# Altium PCB RFID-PCB.PcbDoc
Units mm, origin at the board's own origin, x right, y up, seen from the top; angles counter-clockwise.
Board outline 77 x 135 mm, 2 copper layers (Top Layer, Bottom Layer); 85 components, 57 nets, 286 pads, 72 vias.
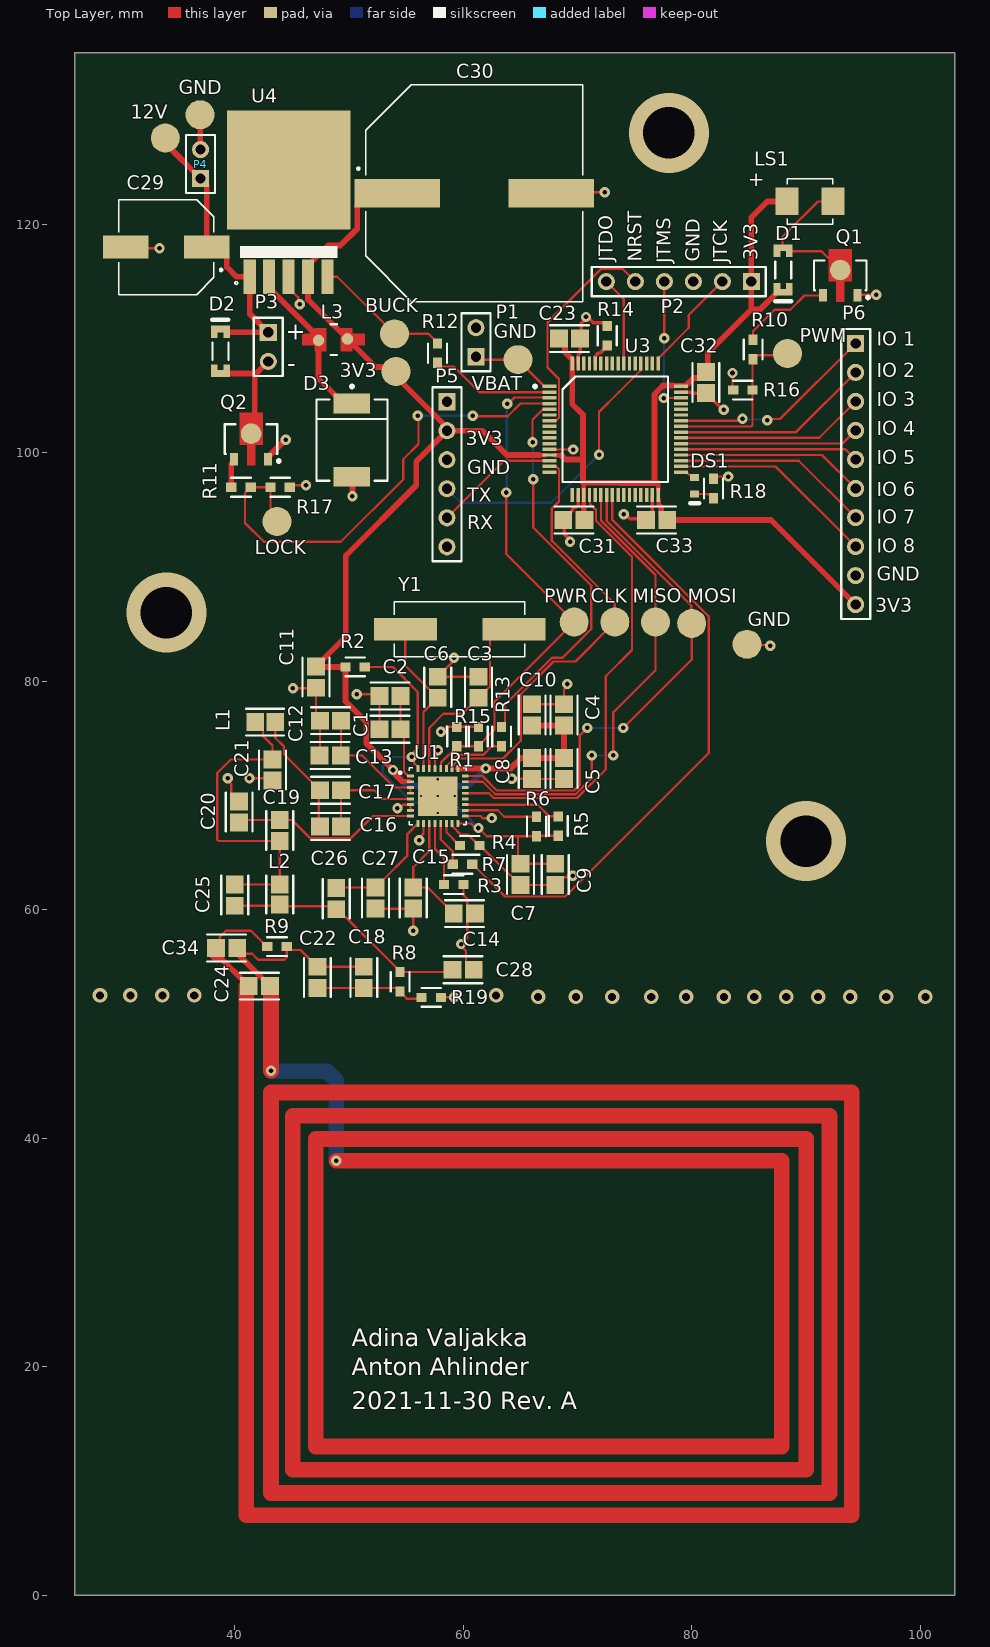
[diagram p0: Top Layer view]
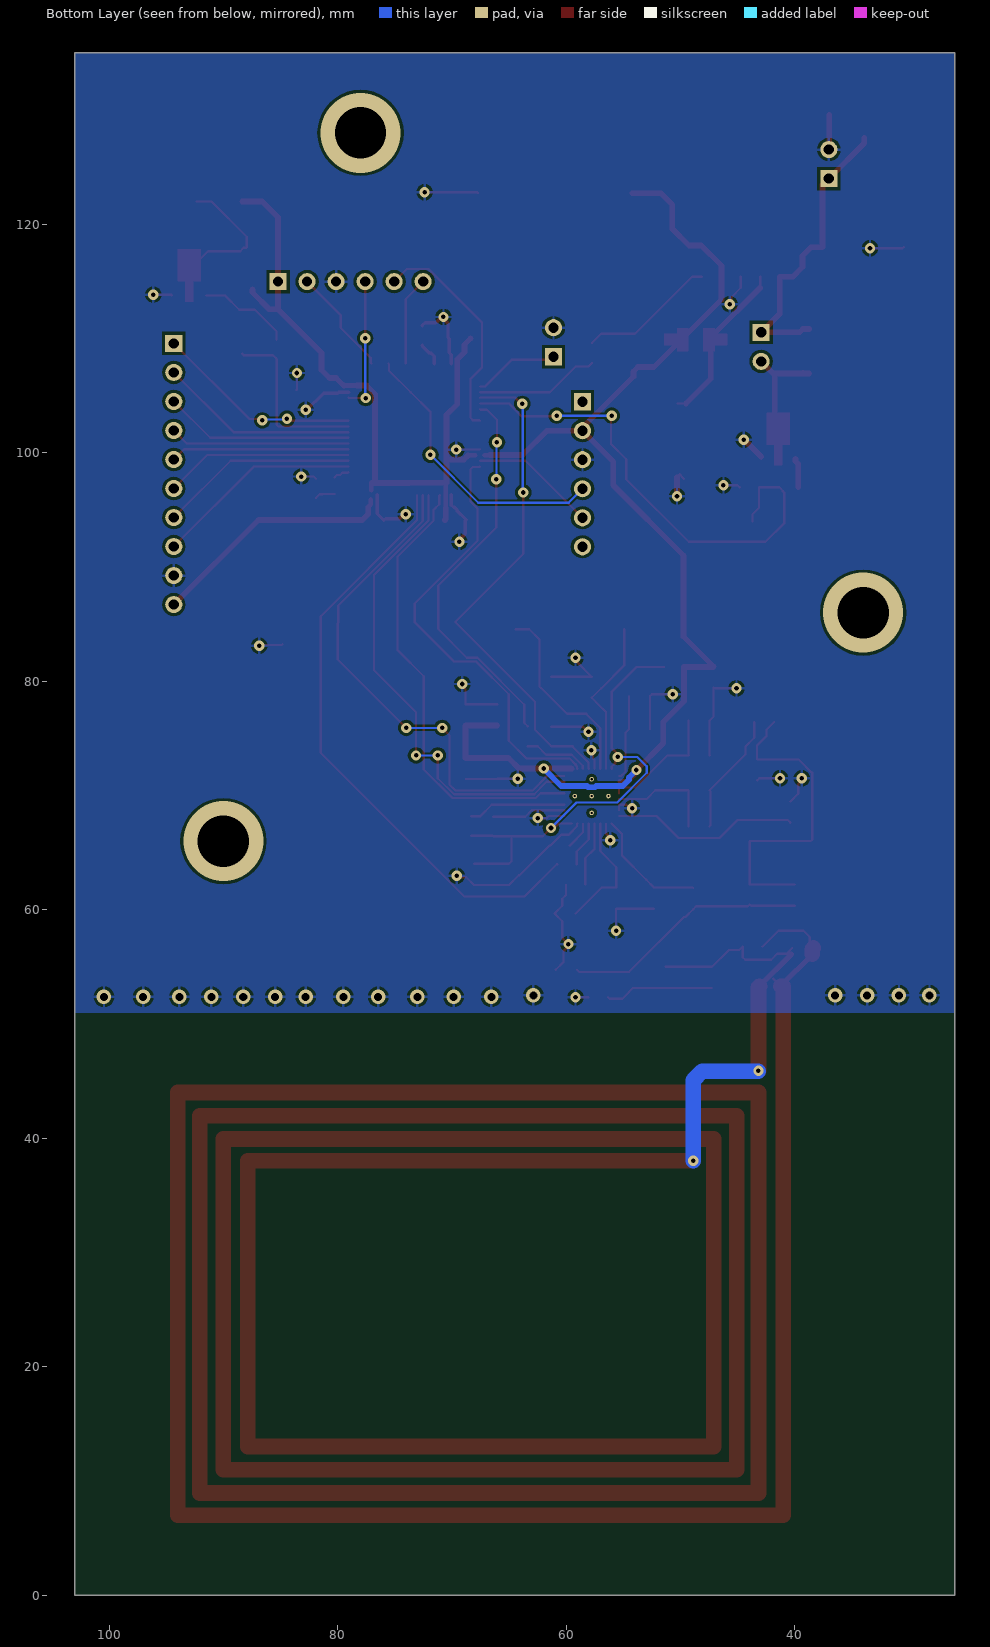
[diagram p1: Bottom Layer view, seen from below]
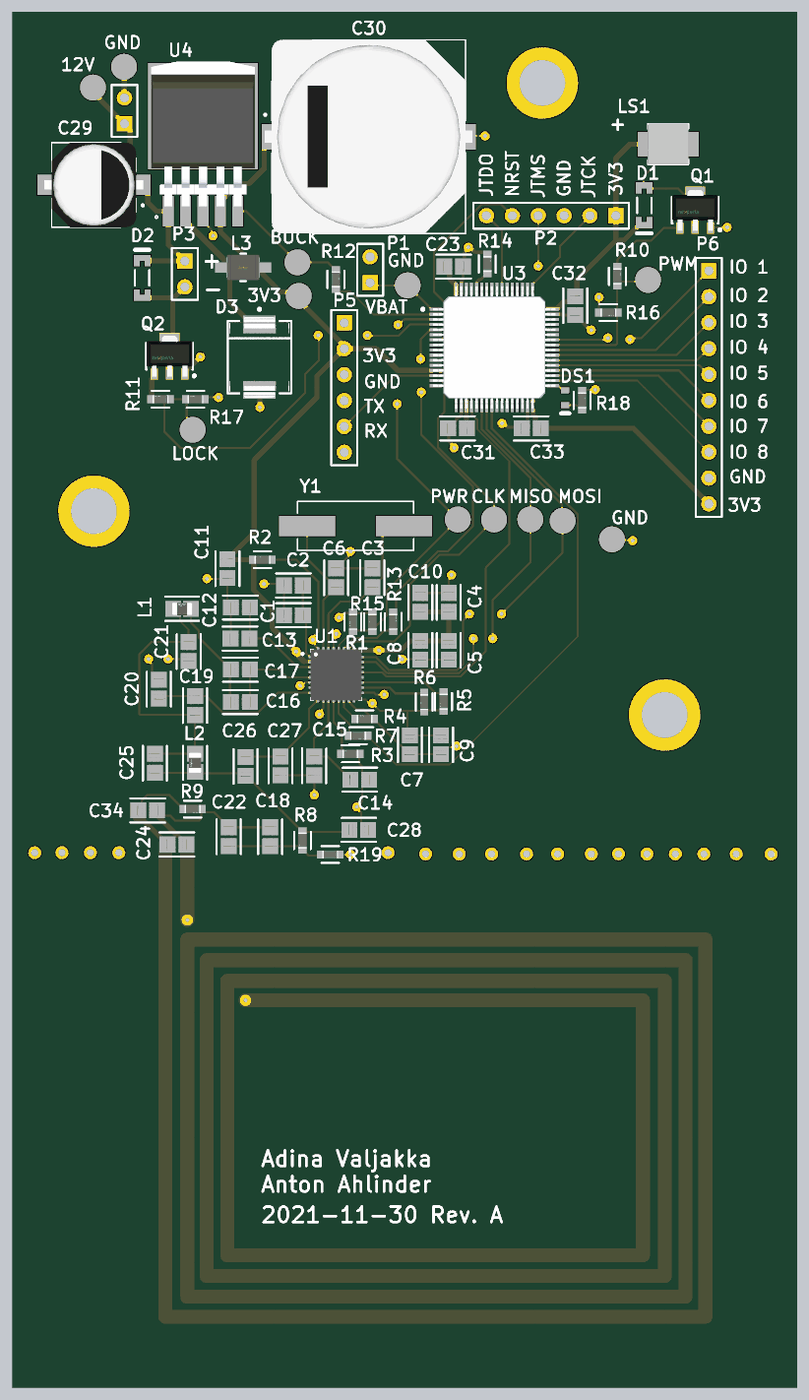
[diagram p2: 3D render of the assembled board from above, using the file's embedded part models]

## Layer stack, top to bottom
Top Solder: solder mask 0.0102, Solder Resist, Dk 3.5
Top Layer: signal copper 0.0356
Dielectric 1: dielectric 0.32, FR-4, Dk 4.8
Bottom Layer: signal copper 0.0356
Bottom Solder: solder mask 0.0102, Solder Resist, Dk 3.5

## Board outline
26,0 103,0 103,135 26,135

## Design rules (kind name [scope] priority, off if disabled: settings)
Clearance [All] p1: gap=0.254 ignorepadtopadclearanceinfootprint=FALSE except(0: Arc-Hole Track-Hole SMDPad-Hole THPad-Hole Via-Hole Fill-Hole Poly-Hole Region-Hole Text-Hole; 0.125: Arc-Arc Arc-Track Arc-SMDPad Arc-Via Track-Track Track-SMDPad Track-Via SMDPad-SMDPad Via-Via; 0.15: Arc-Fill Arc-Poly Arc-Region Track-Fill Track-Poly Track-Region)
HoleSize [All] p1: absolutevalues=TRUE maxlimit=7 minlimit=0.025 maxpercent=80.000 minpercent=20.000
MinimumSolderMaskSliver [All] p1: minsoldermaskwidth=0.1
PolygonConnect [All] p1: connectstyle=Relief reliefconductorwidth=0.254 reliefentries=4 polygonreliefangle="90 Angle" airgapwidth=0.254
RoutingVias [All] p1: holewidth=0.4 width=0.9 viastyle="Through Hole" minholewidth=0.4 minwidth=0.4 maxholewidth=0.711 maxwidth=1.27
SilkToSilkClearance [All] p1: silktosilkclearance=0.05
SilkToSolderMaskClearance [IsPad] p1: minsilkscreentomaskgap=0.05 clearancetoexposedcopper=TRUE
SolderMaskExpansion [All] p1: expansion=0.102 istentingtop=FALSE
Width [All] p1: maxlimit=1.37 minlimit=0.125 preferedwidth=0.2 minimp=50.000000 maximp=50.000000 favimp=50.000000
26 further rules are at their usual default settings.

## Classes and differential pairs
component class RFID: C1 C2 C3 C4 C5 C6 C7 C8 C9 C10 C11 C12 C13 C14 C15 C16 C17 C18 C19 C20 C21 C22 C24 C25 C26 C27 C28 C34 L1 L2 R1 R2 R3 R4 R5 R6 R7 R8 R9 R13 R15 R19 U1 Y1
component class Power: 3V3 12V BUCK C29 C30 D3 GND L3 P4 R12 U4
component class MCU: C23 C31 C32 C33 CLK D1 D2 DS1 GND LOCK LS1 MISO MOSI P1 P2 P3 P5 P6 PWM PWR Q1 Q2 R10 R11 R14 R16 R17 R18 U3 VBAT

## Components (designator, comment, footprint, x,y, rotation, side; value= is the part's Value field where it differs from the comment)
3V3 "testpoint" Testpoint 54.102,107.108 r0 top (schematic designator TP8)
12V "testpoint" Testpoint 33.909,127.555 r0 top (schematic designator TP7)
BUCK "testpoint" Testpoint 53.975,110.41 r0 top (schematic designator TP9)
C1 "10nF" FP-GCJ21B-0_3-IPC_A 53.578,75.786 r0 top
C2 "2.2uF" FP-GCJ21B-0_3-IPC_A 53.578,78.707 r0 top
C3 "27pF" FP-GCJ21B-0_3-IPC_A 61.325,79.469 r270 top
C4 "10nF" FP-GCJ21B-0_3-IPC_A 68.818,77.056 r270 top
C5 "10nF" FP-GCJ21B-0_3-IPC_A 68.818,72.357 r90 top
C6 "27pF" FP-GCJ21B-0_3-IPC_A 57.769,79.469 r90 top
C7 "10nF" FP-GCJ21B-0_3-IPC_A 65.008,63.086 r270 top
C8 "10nF" FP-GCJ21B-0_3-IPC_A 66.024,72.357 r90 top
C9 "2.2uF" FP-GCJ21B-0_3-IPC_A 68.056,63.086 r270 top
C10 "2.2uF" FP-GCJ21B-0_3-IPC_A 66.024,77.056 r270 top
C11 "0.1uF" FP-GCJ21B-0_3-IPC_A 47.101,80.358 r270 top
C12 "10nF" FP-GCJ21B-0_3-IPC_A 48.371,76.548 r0 top
C13 "2.2uF" FP-GCJ21B-0_3-IPC_A 48.335,73.5 r0 top
C14 "10nF" FP-GCJ21B-0_3-IPC_A 60.091,59.657 r180 top
C15 "2.2uF" FP-GCJ21B-0_3-IPC_A 55.61,61.018 r90 top
C16 "1500pF" FP-GCJ21B-0_3-IPC_A 48.371,67.277 r0 top
C17 "1500pF" FP-GCJ21B-0_3-IPC_A 48.371,70.452 r0 top
C18 "47pF" FP-GCJ21B-0_3-IPC_A 51.292,54.069 r90 top
C19 "1200pF" FP-GCJ21B-0_3-IPC_A 43.926,66.932 r90 top
C20 "1200pF" FP-GCJ21B-0_3-IPC_A 40.37,68.547 r90 top
C21 "680pF" FP-GCJ21B-0_3-IPC_A 43.291,72.23 r270 top
C22 "10pF" FP-GCJ21B-0_3-IPC_A 47.228,54.069 r270 top
C23 "100nF" FP-GCJ21B-0_3-IPC_A 69.297,109.992 r180 top
C24 "56pF" FP-GCJ21B-0_3-IPC_A 42.148,53.307 r180 top
C25 "10pF" FP-GCJ21B-0_3-IPC_A 39.989,61.272 r90 top
C26 "220pF" FP-GCJ21B-0_3-IPC_A 48.879,60.963 r90 top
C27 "680pF" FP-GCJ21B-0_3-IPC_A 52.308,61.018 r270 top
C28 "100pF" FP-GCJ21B-0_3-IPC_A 59.98,54.737 r0 top
C29 "EEETC1C101P" CAP_EEETC1C101P 34,118 r180 top
C30 "EEETK1H102AM" CAP_EEETK1H102AM 60.96,122.729 r0 top
C31 "100nF" FP-GCJ21B-0_3-IPC_A 69.678,94.117 r180 top
C32 "100nF" FP-GCJ21B-0_3-IPC_A 81.235,106.146 r90 top
C33 "100nF" FP-GCJ21B-0_3-IPC_A 76.917,94.117 r180 top
C34 "DNP" FP-GCJ21B-0_3-IPC_A 39.279,56.642 r0 top
CLK "testpoint" Testpoint 73.263,85.184 r0 top (schematic designator TP3)
D1 "LL4148" FAIR-SOD80-2_V 88,116 r270 top
D2 "LL4148" FAIR-SOD80-2_V 38.735,108.886 r90 top
D3 "SS34-E3/57T" FP-95402-MFG 50.247,101.102 r270 top
DS1 "TLMS1000-GS08" VISH-TLMS1000_V 80.248,97.122 r270 top
GND "testpoint" Testpoint 36.957,129.587 r90 top (schematic designator TP12)
GND "testpoint" Testpoint 84.836,83.232 r90 top (schematic designator TP11)
L1 "LQM21NNR33K10D" FP-LQM21DN_00-IPC_A 42.656,76.421 r180 top
L2 "LQM21NNR33K10D" FP-LQM21DN_00-IPC_A 43.926,61.321 r270 top
L3 "LQH32CN101K23L" FP-LQH32CH_23-MFG 48.641,109.902 r0 top
LOCK "testpoint" Testpoint 43.688,93.98 r0 top (schematic designator TP2)
LS1 "CMT-4023S-SMT-TR" CUI_CMT-4023S-SMT-TR 90.35,122 r180 top
MISO "testpoint" Testpoint 76.819,85.184 r0 top (schematic designator TP5)
MOSI "testpoint" Testpoint 79.994,85.057 r0 top (schematic designator TP4)
P1 "Header 2" HDR1X2 61.106,108.405 r90 top
P2 "Header 6" HDR1X6 85.217,114.982 r180 top
P3 "Header 2" HDR1X2 42.926,110.537 r270 top
P4 "Header 2" HDR1X2 37,124 r90 top
P5 "Header 6" HDR1X6 58.566,104.468 r270 top
P6 "Header 10" HDR1X10 94.345,109.568 r270 top
PWM "testpoint" Testpoint 88.376,108.679 r0 top (schematic designator TP6)
PWR "testpoint" Testpoint 69.707,85.184 r0 top (schematic designator TP1)
Q1 "PBHV8115X,115" FP-SOT89-MFG 93,115.522 r0 top
Q2 "PBHV8115X,115" FP-SOT89-MFG 41.421,101.196 r0 top
R1 "10k" FP-AC0603-MFG 59.42,75.151 r270 top value=60.4Ω
R2 "100" FP-AC0603-MFG 50.53,81.247 r180 top value=60.4Ω
R3 "1k" FP-AC0603-MFG 59.166,62.197 r180 top value=60.4Ω
R4 "1k" FP-AC0603-MFG 60.563,65.626 r180 top value=60.4Ω
R5 "10k" FP-AC0603-MFG 68.31,67.316 r270 top value=60.4Ω
R6 "10k" FP-AC0603-MFG 66.405,67.277 r270 top value=60.4Ω
R7 "1k" FP-AC0603-MFG 59.928,63.975 r0 top value=60.4Ω
R8 "0" FP-AC0603-MFG 54.467,53.688 r270 top value=60.4Ω
R9 "1k" FP-AC0603-MFG 43.688,56.769 r0 top value=60.4Ω
R10 "220" FP-AC0603-MFG 85.363,109.04 r90 top value=60.4Ω
R11 "220" FP-AC0603-MFG 40.532,96.975 r180 top value=60.4Ω
R12 "0" FP-AC0603-MFG 57.74,108.722 r90 top value=60.4Ω
R13 "0" FP-AC0603-MFG 63.357,75.151 r90 top value=60.4Ω
R14 "0" FP-AC0603-MFG 72.599,110.246 r90 top value=60.4Ω
R15 "100k" FP-AC0603-MFG 61.325,75.151 r270 top value=60.4Ω
R16 "100k" FP-AC0603-MFG 84.474,105.484 r0 top value=60.4Ω
R17 "100k" FP-AC0603-MFG 43.961,96.975 r180 top value=60.4Ω
R18 "1K" FP-AC0603-MFG 81.899,96.868 r90 top value=60.4Ω
R19 "DNP" FP-AC0603-MFG 57.189,52.324 r180 top value=60.4Ω
U1 "TRF7960RHBT" IC_ADS125H01IRHBT 57.769,69.944 r0 top
U3 "STM32L451RCT6" LQFP-64 73.298,102.055 r0 top
U4 "LM2576D2TR4-3.3G" D2PAK-5 44.704,119.935 r90 top
VBAT "testpoint" Testpoint 64.789,108.151 r90 top (schematic designator TP10)
Y1 "ECS-135.600-CDX-0374" XTAL_ECS-135.600-CDX-0374 59.674,84.549 r0 top

## Footprints (in the part's own frame and the unit in brackets; to place one, negate y for a bottom-side part, rotate by r counter-clockwise, add the part's x,y. Pads: shape width x height; smd on the part's side, far side on the other; paste and mask are expansions set on the pad)
CAP_EEETC1C101P [mm]
  rect 4x2 smd: 1(-3.55,0) 2(3.55,0)
  silkscreen extent -4.9,-4.15 4.15,4.15, body extent -4.85,-4.15 4.85,4.15, height 10.2
CAP_EEETK1H102AM [mm]
  rect 7.5x2.5 smd: 1(-6.75,0) 2(6.75,0)
  silkscreen extent -10.25,-9.5 9.5,9.5, body extent -10.2,-9.5 10.2,9.5, height 16.51
CUI_CMT-4023S-SMT-TR [mm]
  rect 2x2.4 smd: N(-2,0) P(2,0)
  silkscreen extent -2,-2 2,2, body extent -2,-2 2,2, height 2
D2PAK-5 [mil]
  rect 118.11x42 smd: 1(-178,134) 2(-178,67) 3(-178,0) 4(-178,-67) 5(-178,-134)
  rect 409.84x425.2 smd: 6(189.37,0)
  silkscreen extent -205,-167 -74,185, body extent -159,-200 400,200, height 180
FAIR-SOD80-2_V [mm] "SOD, 2-Leads, Body 3.45x1.4mm"
  rect 0.6x1.65 smd: 1(-1.95,0) 2(1.95,0)
  rect 1.1x0.575 smd: 1(-1.7,-0.537) 1(-1.7,0.537) 2(1.7,-0.537) 2(1.7,0.537)
  silkscreen extent -0.75,-0.7 2.75,0.7, body extent -1.73,-0.7 1.73,0.7, height 2.1
FP-95402-MFG [mm]
  rect 1.72x3.2 smd paste+0 mask+0: 1(-3.205,0) 2(3.205,0)
  silkscreen extent -4.82,-3.11 3.55,3.11, body extent -4.17,-3.21 4.17,3.21, height 0.25
FP-AC0603-MFG [mm]
  rect 0.9x0.8 smd paste+0 mask+0: 1(-0.85,0) 2(0.85,0)
  silkscreen extent -0.85,-0.82 0.85,0.82, body extent -1.4,-0.55 1.4,0.55, height 0.25
FP-GCJ21B-0_3-IPC_A [mm]
  rect 1.553x1.556 smd paste+0 mask+0: 1(-0.925,0) 2(0.925,0)
  silkscreen extent -1.7,-1.18 1.7,1.18, body extent -2.2,-1.28 2.2,1.28, height 0.25
FP-LQH32CH_23-MFG [mm]
  round 0.995 smd paste+0 mask+0: 1(-1.313,-0.062)
  round 1.012 smd paste+0 mask+0: 2(1.212,0.062)
  Top Layer region: -1.65,-1 -1.65,-0.5 -2.75,-0.5 -2.75,0.5 -1.65,0.5 -1.65,1 -0.65,1 -0.65,-1
  Top Layer region: 0.65,-1 0.65,1 1.65,1 1.65,0.5 2.75,0.5 2.75,-0.5 1.65,-0.5 1.65,-1
  silkscreen extent -0.27,-1.35 0.27,1.35, body extent -2.85,-1.45 2.85,1.45, height 0.25
FP-LQM21DN_00-IPC_A [mm]
  rect 1.554x1.556 smd paste+0 mask+0: 1(-0.876,0) 2(0.876,0)
  silkscreen extent -1.65,-1.18 1.65,1.18, body extent -2.15,-1.28 2.15,1.28, height 0.25
FP-SOT89-MFG [mm]
  rect 0.7x1.1 smd paste-1000 mask+0: 1(1.5,-1.75) 3(-1.5,-1.75)
  round 1.8 smd paste-1000 mask+0: 2(0,0.478)
  Top Layer region: -1,2.3 1,2.3 1,-0.5 0.35,-0.5 0.35,-2.3 -0.35,-2.3 -0.35,-0.5 -1,-0.5
  silkscreen extent -2.3,-2.05 2.55,1.3, body extent -2.4,-2.42 2.4,2.42, height 0.25
HDR1X2 [mm] "Connector; Header; 2 Position"
  rect 1.5x1.5 hole 0.9: 1(0,0)
  round 1.5 hole 0.9: 2(2.54,0)
  silkscreen extent -1.27,-1.27 3.81,1.27
HDR1X6 [mm] "Connector; Header; 6 Position"
  rect 1.5x1.5 hole 0.9: 1(0,0)
  round 1.5 hole 0.9: 2(2.54,0) 3(5.08,0) 4(7.62,0) 5(10.16,0) 6(12.7,0)
  silkscreen extent -1.27,-1.27 13.97,1.27
HDR1X10 [mm] "Connector; Header; 10 Position"
  rect 1.5x1.5 hole 0.9: 1(0,0)
  round 1.5 hole 0.9: 2(2.54,0) 3(5.08,0) 4(7.62,0) 5(10.16,0) 6(12.7,0) 7(15.24,0) 8(17.78,0) 9(20.32,0) 10(22.86,0)
  silkscreen extent -1.27,-1.27 24.13,1.27
IC_ADS125H01IRHBT [mm]
  rrect25% 0.6x0.25 smd mask+0: 1(-2.4,1.75) 2(-2.4,1.25) 3(-2.4,0.75) 4(-2.4,0.25) 5(-2.4,-0.25) 6(-2.4,-0.75) 7(-2.4,-1.25) 8(-2.4,-1.75) 17(2.4,-1.75) 18(2.4,-1.25) 19(2.4,-0.75) 20(2.4,-0.25) 21(2.4,0.25) 22(2.4,0.75) 23(2.4,1.25) 24(2.4,1.75)
  rrect25% 0.25x0.6 smd mask+0: 9(-1.75,-2.4) 10(-1.25,-2.4) 11(-0.75,-2.4) 12(-0.25,-2.4) 13(0.25,-2.4) 14(0.75,-2.4) 15(1.25,-2.4) 16(1.75,-2.4) 25(1.75,2.4) 26(1.25,2.4) 27(0.75,2.4) 28(0.25,2.4) 29(-0.25,2.4) 30(-0.75,2.4) 31(-1.25,2.4) 32(-1.75,2.4)
  rect 3.45x3.45 smd paste-3 mask+0: 33(0,0)
  round 0.4 hole 0.2 mask+0: 34(0,0) 35(0,1.475) 36(-1.475,0) 37(0,-1.475) 38(1.475,0)
  silkscreen extent -3.39,-2.5 2.5,2.5, body extent -2.5,-2.5 2.5,2.5, height 1
LQFP-64 [mm]
  rect 1.2x0.3 smd mask+0.05: 1(-5.75,3.75) 2(-5.75,3.25) 3(-5.75,2.75) 4(-5.75,2.25) 5(-5.75,1.75) 6(-5.75,1.25) 7(-5.75,0.75) 8(-5.75,0.25) 9(-5.75,-0.25) 10(-5.75,-0.75) 11(-5.75,-1.25) 12(-5.75,-1.75) 13(-5.75,-2.25) 14(-5.75,-2.75) 15(-5.75,-3.25) 16(-5.75,-3.75) 33(5.75,-3.75) 34(5.75,-3.25) 35(5.75,-2.75) 36(5.75,-2.25) 37(5.75,-1.75) 38(5.75,-1.25) 39(5.75,-0.75) 40(5.75,-0.25) 41(5.75,0.25) 42(5.75,0.75) 43(5.75,1.25) 44(5.75,1.75) 45(5.75,2.25) 46(5.75,2.75) 47(5.75,3.25) 48(5.75,3.75)
  rect 0.3x1.2 smd mask+0.05: 17(-3.75,-5.75) 18(-3.25,-5.75) 19(-2.75,-5.75) 20(-2.25,-5.75) 21(-1.75,-5.75) 22(-1.25,-5.75) 23(-0.75,-5.75) 24(-0.25,-5.75) 25(0.25,-5.75) 26(0.75,-5.75) 27(1.25,-5.75) 28(1.75,-5.75) 29(2.25,-5.75) 30(2.75,-5.75) 31(3.25,-5.75) 32(3.75,-5.75) 49(3.75,5.75) 50(3.25,5.75) 51(2.75,5.75) 52(2.25,5.75) 53(1.75,5.75) 54(1.25,5.75) 55(0.75,5.75) 56(0.25,5.75) 57(-0.25,5.75) 58(-0.75,5.75) 59(-1.25,5.75) 60(-1.75,5.75) 61(-2.25,5.75) 62(-2.75,5.75) 63(-3.25,5.75) 64(-3.75,5.75)
  silkscreen extent -7.15,-4.61 4.61,4.61, body extent -6,-6 6,6, height 1.46
Testpoint [mm]
  round 2.54 smd: 1(0,0)
VISH-TLMS1000_V [mm] "SMD, 2-Leads, Body 0.8x1.6mm"
  rect 0.6x0.8 smd: 1(-0.725,0) 2(0.725,0)
  silkscreen extent 1.53,-0.4 1.53,0.4, body extent -0.8,-0.4 0.8,0.4, height 0.65
XTAL_ECS-135.600-CDX-0374 [mm]
  rect 5.5x2 smd: 1(-4.75,0) 2(4.75,0)
  silkscreen extent -5.7,-2.4 5.7,2.4

## Part data
C1 C3 C4 C5 C6 C7 C8 C11 C12 C14 C16 C17 C18 C19 C20 C21 C22 C23 C24 C25 C26 C27 C28 C31 C32 C33 C34: library part CMP-2007-03210-2, "Multilayer Ceramic Capacitors MLCC - SMD/SMT 0805 2.2uF 10%, 16VDC,  X7R 15%", Capacitance=2.2uF, Case Code (Imperial)=0805, Case Code (Metric)=2012, Dielectric=X7R, Max Operating Temperature=125°C, Min Operating Temperature=-55°C, Package Quantity=1, Ratings=AEC-Q200, Tolerance=10%, Voltage Rating=16V, Case/Package=0805, Depth=1.25mm, Features="Soft Termination", Height=1.25mm, Lead Free="Lead Free", Length=2mm, Mount="Surface Mount", Packaging="Tape and Reel", Radiation Hardening=No, Termination=SMD/SMT, Thickness=0.057inch, Voltage Rating (DC)=16V, Width=0.049inch
C2 C9 C10 C13 C15: library part CMP-2007-03210-2, "Multilayer Ceramic Capacitors MLCC - SMD/SMT 0805 2.2uF 10%, 16VDC,  X7R 15%", Case Code (Imperial)=0805, Case Code (Metric)=2012, Dielectric=X7R, Max Operating Temperature=125°C, Min Operating Temperature=-55°C, Package Quantity=1, Ratings=AEC-Q200, Tolerance=10%, Voltage Rating=16V, Capacitance=2.2uF, Case/Package=0805, Depth=1.25mm, Features="Soft Termination", Height=1.25mm, Lead Free="Lead Free", Length=2mm, Mount="Surface Mount", Packaging="Tape and Reel", Radiation Hardening=No, Termination=SMD/SMT, Thickness=0.057inch, Voltage Rating (DC)=16V, Width=0.049inch
C29: "100µF 16V Aluminum Electrolytic Capacitors Radial, Can - SMD 200mOhm @ 100kHz 3000 Hrs @ 125°C", Package="RADIAL-2 Panasonic", Availability="In Stock", Check_prices=https://www.snapeda.com/parts/EEETC1C101P/Panasonic/view-part/?ref=eda, MF=Panasonic, MP=EEETC1C101P, Price=None, SnapEDA_Link=https://www.snapeda.com/parts/EEETC1C101P/Panasonic/view-part/?ref=snap
C30: "1000µF 50V Aluminum Electrolytic Capacitors Radial, Can - SMD 140mOhm @ 100kHz 2000 Hrs @ 125°C", Package="RADIAL-2 Panasonic", Availability="In Stock", Check_prices=https://www.snapeda.com/parts/EEE-TK1H102AM/Panasonic%20Electronic%20Components/view-part/2193516/?ref=eda, MF="Panasonic Electronic", MP=EEE-TK1H102AM, Price=None, Purchase-URL=https://pricing.snapeda.com/search/part/EEE-TK1H102AM/?ref=eda, SnapEDA_Link=https://www.snapeda.com/parts/EEE-TK1H102AM/Panasonic%20Electronic%20Components/view-part/2193516/?ref=snap
D1 D2: library part CMP-2000-05115-2, "Small Signal Diode, 100 V, 0.2 A, -55 to 175 degC, 2-Pin SOD80, RoHS, Tape and Reel", Average Forward Current-Max=200mA, Forward Voltage=1V, Manufacturer=Fairchild, Power Dissipation=500mW, Reverse Voltage-Max [Vrrm]=100V, Datasheet URL=https://www.fairchildsemi.com/datasheets/LL/LL4148.pdf, Datasheet Version="Rev. 1.8, 01/2016", Manufacturer URL=https://www.fairchildsemi.com/, Reverse Recovery Time-Max=1ns
D3: library part CMP-02539-000012-1, "DIODE SCHOTTKY 40V 3A DO214AB", Forward Current=3A, Manufacturer=Vishay, Max Junction Temp=+150°C, Max Repetitive Reverse Voltage=40V, Max Surge Forward Current=100A, Package=95402, Peak Reverse Current=0.5mA, Temperature="-55°C to +150°C", Temperature Range Low=-55°C, Automotive=No, Category=Diode, ComponentLink2Description=Datasheet, ComponentLink2URL=http://www.vishay.com/docs/88751/ss32.pdf, Device Class L1="Discrete Semiconductors", Device Class L2=Diodes, Device Class L3="Schottky Diodes", Digikey Description="DIODE SCHOTTKY 40V 3A DO214AB", Footprint Url=http://www.vishay.com/docs/95402/smc.pdf, Height=2.62mm, Lead Free=Yes, Manufacturer Part Number=SS34-E3/57T, Mouser Description="Schottky Diodes & Rectifiers 3.0 Amp 40 Volt", Octopart=https://octopart.com/ss34-e3%2F57t-vishay-39552907, RoHS=TRUE, Standoff Height=0mm, Temperature Range High=+150°C
DS1: library part CMP-2000-07254-1, "Low Current LED, 40 mW, 1.8 V, -40 to 100 degC, 2-Pin SMD (0603), RoHS, Tape and Reel", Forward Current If=2mA, Forward Voltage=1.8V, LED Colour=Red, Manufacturer=Vishay, Package Description="2-Pin Surface Mount Device, Body 1.6 x 0.8 mm", Package Reference=TLMS1000, Automotive Qualification Standard=AEC-Q100, Bulb Size=1.6mmx0.8mm, Datasheet URL=https://datasheet.ciiva.com/5798/1698881-5798337.pdf, Datasheet Version="Rev. 1.7, 02/2011", LED Mounting=SMD, Lens Shape=Rectangular, Luminous Intensity=4mcd, Manufacturer URL=http://www.vishay.com/, Mounting Technology=SurfaceMount, MSL=MSL2-1year, Packaging=CutTape, Product Range=-, SVHC=ToBeAdvised, Viewing Angle=80°, Wavelength Typ=636nm
L1 L2: library part CMP-06042-017039-1, "Multilayer Type Inductor for General Circuits, 0805 (2012), 0.33μH, 10%, 0.48Ω, 250mA", Case Code (Imperial)=0805, Case Code (Metric)=2012, Current Rating=250mA, DC Resistance (DCR)=480mR, Inductance=330nH, Inductance Tolerance=10%, Max Operating Temperature=85°C, Min Operating Temperature=-40°C, Package Quantity=4000, Self Resonant Frequency=180MHz, Test Frequency=25MHz, Case/Package=0805, Core Material=Ferrite, DC Current=250mA, Depth=1.45mm, Height=0.85mm, Height - Seated (Max)=0.041inch, Length=2mm, Max DC Current=250mA, Military Standard=Not, Mount="Surface Mount", Number of Pins=2, Packaging="Tape and Reel", Q Factor=20, Radiation Hardening=No, REACH SVHC="No SVHC", RoHS Compliant=Yes, Series=LQM21N, Shielding=Shielded, Termination=SMD/SMT, Tolerance=10%, Width=0.049inch
L3: library part CMP-06042-006648-2, "Wire Wound Ferrite Inductor for Power Lines 100μH ±10% 4.55Ω 100mA 1210", Case Code (Imperial)=1210, Case Code (Metric)=3225, Current=1.1A, Current Rating=100mA, DC Resistance (DCR)=3.5R, Frequency=10MHz, Inductance=100uH, Inductance Tolerance=10%, Inductor Type=Wirewound, Max Operating Temperature=85°C, Min Operating Temperature=-40°C, Package Quantity=2000, Test Frequency=1MHz, Case/Package=1210, Core Material=Ferrite, DC Current=100mA, Depth=2.7mm, Height=2mm, Lead Free="Lead Free", Length=3.2mm, Max DC Current=100mA, Military Standard=Not, Mount="Surface Mount", Number of Pins=2, Packaging="Tape and Reel", Q Factor=40, Radiation Hardening=No, Rated Current-Max=100mA, REACH SVHC="No SVHC", RoHS Compliant=Yes, Self Resonant Frequency=10MHz, Series=LQH32C_33, Shielding=Unshielded, Termination=SMD/SMT, Tolerance=10%, Weight=0.002116oz, Width=2.5mm
LS1: "4 mm, 3 Vo-p, 70 dB, Surface Mount _SMT_, Magnetic Audio Transducer Buzzer", Package="SIP-1 CUI", Availability=Unavailable, CUI_purchase_URL=https://www.cuidevices.com/product/audio/buzzers/audio-transducers/cmt-4023s-smt-tr?utm_source=snapeda.com&utm_medium=referral&utm_campaign=snapedaBOM, MF="CUI Devices", MP=CMT-4023S-SMT-TR, Price=None, SnapEDA_Link=https://www.snapeda.com/parts/CMT-4023S-SMT-TR/CUI%20Devices/view-part/612102/?ref=snap
P1 P3 P4: "Header, 2-Pin", LatestRevisionDate=17-Jul-2002, LatestRevisionNote="Re-released for DXP Platform.", Publisher="Altium Limited"
P2 P5: "Header, 6-Pin", LatestRevisionDate=17-Jul-2002, LatestRevisionNote="Re-released for DXP Platform.", Publisher="Altium Limited"
P6: "Header, 10-Pin", LatestRevisionDate=17-Jul-2002, LatestRevisionNote="Re-released for DXP Platform.", Publisher="Altium Limited"
Q1 Q2: library part CMP-14406-000018-1, "TRANS NPN 150V 1A SOT89", Ambient Temperature Range High=+150°C, Ambient Temperature Range Low=-55°C, Collector Base Voltage=400V, Collector Emitter Saturation Voltage=33mV, Collector Emitter Voltage=150V, Emitter Base Voltage=6V, Manufacturer=Nexperia, Max Collector Current=1A, Package=SOT89, Power Dissipation=0.52W, Temperature="to +150°C", Automotive=Yes, Automotive Grade="Grade 0", Category=Trans, ComponentLink2Description=Datasheet, ComponentLink2URL=https://assets.nexperia.com/documents/data-sheet/PBHV8115X.pdf, Delay Time Td=7ns, Device Class L1="Discrete Semiconductors", Device Class L2=Transistors, Device Class L3=BJTs, Digikey Description="TRANS NPN 150V 1A SOT89", Fall Time Tf=700ns, Footprint Url=https://assets.nexperia.com/documents/outline-drawing/SOT89.pdf, Gain Bandwidth Product=30MHz, Height=1.6mm, Hfe Min=10, Hfe Testic=1A, Hfe Testvce=10V, Lead Free=Yes, Manufacturer Part Number=PBHV8115X,115, Max Junction Temp=+150°C, Number Of Elements=1, Number Of Npn=1, Octopart=https://octopart.com/pbhv8115x%2C115-nexperia-78740688, Rise Time Tr=565ns, RoHS=TRUE, Rthja Max=240K/W, Storage Time Ts=1530ns, Temperature Range High=+150°C
R1 R2 R3 R4 R5 R6 R7 R8 R9 R10 R11 R12 R13 R14 R15 R16 R17 R18 R19: library part CMP-03412-025180-1, "RES SMD 60.4 OHM 1% 1/10W 0603", Manufacturer=Yageo, Manufacturer Part Number=AC0603FR-0760R4L, Package=AC0603, Power Rating=0.1W, Resistance=60.4Ω, Temperature="-55°C to +155°C", Temperature Range High=+155°C, Temperature Range Low=-55°C, Tolerance=0.01, Voltage Rating=75V, Automotive=Yes, Automotive Grade="Grade 0", Category=Res, ComponentLink2Description=Datasheet, ComponentLink2URL=http://www.yageo.com/NewPortal/yageodocoutput?fileName=/pdf/R-Chip/PYu-AC_51_RoHS_L_6.pdf, Composition="Thick Film", Device Class L1="Passive Components", Device Class L2=Resistors, Device Class L3="Chip SMD Resistors", Digikey Description="RES SMD 60.4 OHM 1% 1/10W 0603", Footprint Url=http://www.yageo.com/exep/pages/download/literatures/PYu-R_Mount_9.pdf, Height=0.55mm, Ipc Land Pattern Name=RESC16080X45, Lead Free=Yes, Mouser Description="Res Thick Film 0603 60.4 Ohm 1% 0.1W(1/10W) ±100ppm/C Epoxy Pad SMD Automotive T/R", Octopart=https://octopart.com/ac0603fr-0760r4l-yageo-71367350, RoHS=TRUE, Series=AC
U1: "TRF7960 Multi-Protocol Fully Integrated 13.56-MHz RFID Reader/Writer IC 32-VQFN -40 to 110"
U3: "MCU 32-bit STM32", Manufacturer=STMicroelectronics, Category=Microcontrollers, Manufacturer Part Number=STM32L451RCT6, RoHS=Yes
U4: "http://octopart.com/lm2576d2tr4-5g-on+semiconductor-46514222", Package=None, Availability=Unavailable, MP=LM2576D2TR4-3.3G, Price=None
Y1: Package=None, Availability=Unavailable, MP=ECS-135.600-CDX-0374, Price=None

## Via types
v1: diameter 0.9, hole 0.4, Top Layer to Bottom Layer, 52 vias
v2: diameter 1.27, hole 0.711, Top Layer to Bottom Layer, 17 vias
v3: diameter 7, hole 4.5, Top Layer to Bottom Layer, 3 vias

## Nets (pads, with @x,y where several pads share a name; then routed paths per layer and width w, separated by ;. In a path a pad name is that pad's centre, name@x,y a point inside that pad or via, vN(x,y) a via of type N, cw(c..) or ccw(c..) an arc to the next point about the centre after c; other vN are vias at no path point)
12V: 12V.1 C29.1 D2.2 P3.1 P4.1 U4.1 | length 26.3
  Top Layer w0.5: 12V.1 33.909,127.091 P4.1 37.55,123.45 C29.1 38.55,118 39.3,117.25 39.3,116.25 40.136,115.414 U4.1 41.3,112.163 P3.1 39.559,110.537 39.26,110.836 D2.2@38.735,110.836
BOOT0: R14.1 U3.60 | length 2.1
  Top Layer w0.3: U3.60 71.548,108.444 71.835,108.731 71.984,108.731 72.599,109.346 R14.1
BUCK_EN: R12.1 U3.2 | length 10.9
  Top Layer w0.2: R12.1 57.741,107.855 58.041,107.555 59.162,107.555 61.412,105.305 U3.2
"CLK (GPIO)": CLK.1 U1.26 U3.15 | length 38.9
  Top Layer w0.2: U1.26 59.044,72.369 59.044,72.544 59.169,72.669 59.169,72.719 59.688,73.238 63.463,73.238 65.021,74.797 65.021,78.851 67.9,81.73 69.809,81.73 CLK.1 73.263,86.784 67.751,92.296 67.751,95.111 68.373,95.733 68.373,98.548 68.166,98.755 67.598,98.755 U3.15
DVCC: 3V3.1 C4.2 C5.2 C8.2 C10.2 C11.1 C23.2 C30.1 C31.1 C32.2 C33.1 D1.2 L3.2 LS1.P P2.1 P5.2 P6.10 R2.2 U1.2 U1.25 U3.13 U3.19 U3.32 U3.48 U3.64 U4.4 | length 190.5
  Top Layer w0.4: 54.635,71.244 U1.2@55.319,71.244 ; 66.659,99.78 U3.13@67.148,99.78 ; U3.13@67.948,99.78 68.573,99.78 ; 70.469,97.376 70.548,97.297 U3.19 70.548,95.169 ; U3.32@77.048,96.705 77.048,97.359 ; U3.32@77.098,95.905 77.098,95.446 77.327,95.217 ; 78.343,105.885 U3.48@79.478,105.885
  Top Layer w0.5: C11.1 C11.1 ; C30.1 51.71,122.729 50.71,121.729 50.71,119.616 49.234,118.14 48.165,118.14 46.406,116.38 46.406,113.412 L3.2 52.32,107.498 53.712,107.498 3V3.1 54.102,106.663 58.566,102.199 P5.2 ; 54.635,71.244 54.046,71.832 54.046,71.922 53.846,72.122 v1(53.846,72.23) 51.501,74.575 51.501,76.429 49.68,78.25 R2.2 47.139,81.247 C11.1 ; U1.25 59.526,72.351 61.953,72.351 v1(61.96,72.357) 64.093,72.357 64.106,72.344 65.044,73.282 C8.2 C5.2 C4.2 C10.2 ; 66.659,99.805 63.809,99.805 61.686,101.928 P5.2 ; C23.2 68.899,109.466 68.899,108.804 69.523,108.18 69.523,104.267 70.469,103.321 70.469,99.408 ; 68.573,99.78 68.945,99.408 70.469,99.408 ; 70.548,95.169 70.548,94.173 C31.1 ; 76.998,97.359 76.727,97.359 ; 77.327,95.217 77.327,94.633 C33.1 86.936,94.117 P6.10 ; 78.343,105.885 77.485,105.885 76.727,105.127 76.727,97.359 ; U3.48@79.478,105.885 80.138,106.545 80.709,106.545 81.407,107.243 81.407,108.759 85.217,112.569 ; D1.2@87.463,114.3 87.463,114.038 85.994,112.569 85.217,112.569 ; LS1.P 86.6,122 85.217,120.617 P2.1 85.217,112.569 ; C11.1 49.719,83.9 49.719,90.996 55.88,97.157 55.88,99.242 P5.2 ; 70.469,99.408 70.469,97.376 73.725,97.376 73.742,97.359 76.727,97.359
  Bottom Layer w0.5: v1(53.846,72.23) 54.497,71.579 54.497,71.382 55.046,70.833 57.359,70.833 57.477,70.715 58.061,70.715 58.179,70.833 60.436,70.833 v1(61.96,72.357)
GND: C1.1 C2.1 C3.1 C4.1 C5.1 C6.2 C7.2 C8.1 C9.2 C10.1 C11.2 C12.1 C13.1 C14.1 C15.1 C20.2 C21.2 C23.1 C27.2 C28.2 C29.2 C30.2 C31.2 C32.1 C33.2 D3.2 GND.1 P1.2 P2.3 P4.2 P5.3 P6.9 Q1.1 Q2.1 R1.1 R3.1 R4.1 R14.2 R15.1 R16.1 R17.1 R18.2 R19.1 U1.6 U1.7 U1.10 U1.15 U1.17 U1.29 U3.12 U3.18 U3.31 U3.47 U3.63 U4.3 | length 121.3
  Top Layer w0.2: C29.2 30.547,117.903 v1(33.401,117.903) ; GND.1@36.957,129.587 GND.1@36.979,129.566 ; P4.2@36.979,126.562 P4.2 ; v1(39.37,71.501) 39.37,71.312 39.692,70.99 39.692,70.149 40.369,69.472 C20.2 ; v1(41.275,71.501) 43.095,71.501 C21.2 ; Q2.1 Q2.1@42.921,99.646 ; v1@44.414,101.139 v1(44.45,101.139) ; U4.3 44.704,114.447 45.551,113.6 45.551,113.145 v1(45.685,113.011) ; R17.1 44.991,97.155 v1(46.228,97.155) ; v1(45.085,79.375) 47.043,79.375 C11.2 47.101,76.893 C12.1 47.446,73.536 C13.1 ; D3.2@49.676,97.707 D3.2@50.056,98.087 ; D3.2 D3.2@50.292,97.853 ; v1(50.673,78.867) 52.493,78.867 C2.1 C1.1 ; C27.2 C15.1 55.626,60.076 v1(55.626,58.166) ; v1(54.229,68.881) 54.418,68.881 54.731,69.194 U1.6 U1.7 ; v1(56.134,66.087) 56.134,66.276 56.519,66.661 U1.10 ; U1.29 57.519,73.111 57.651,73.243 57.651,73.827 v1(57.785,73.961) ; C6.2 C6.2 ; R19.1 v1(59.182,52.324) ; v1(58.039,75.565) 58.062,75.565 58.498,76.001 R15.1 ; U1.15 59.044,67.519 59.044,67.294 59.791,66.548 60.441,66.548 61.363,65.626 R4.1 61.463,65.626 64.079,63.01 64.158,63.01 65.007,62.161 C7.2 C9.2 68.734,62.837 69.458,62.837 v1(69.58,62.959) ; v1(59.182,82.042) 59.048,81.908 59.048,81.672 C6.2 ; R3.1 60.016,61.278 60.34,60.954 60.34,60.334 C14.1 60.34,58.98 60.34,57.529 v1(59.801,56.99) 59.801,56.801 60.229,56.373 60.229,55.414 C28.2 ; U1.17 61.507,68.194 61.702,67.999 62.464,67.999 v1(62.484,68.019) ; C3.1 C6.2 ; v1(64.246,71.468) 65.988,71.468 C8.1 C5.1 ; C10.1 C4.1 68.818,79.297 69.088,79.567 v1(69.088,79.756) ; U3.12 67.562,100.291 69.601,100.291 v1(69.615,100.277) ; C30.2 67.79,122.809 v1(72.39,122.809) ; R18.2 82.098,97.917 v1(83.185,97.917) ; v1(83.566,106.981) 83.566,105.542 R16.1 ; GND.1@84.836,83.232 84.9,83.169 86.804,83.169 v1(86.868,83.105) ; Q1.1 94.567,113.839 v1(96.139,113.839)
  Top Layer w0.3: D3.2@50.056,98.087 D3.2 D3.2 ; v1(69.342,92.202) 69.342,92.364 68.818,92.888 68.818,94.053 C31.2 68.753,94.119 69.552,94.918 69.552,95.009 69.754,95.211 69.847,95.211 70.048,95.412 U3.18 ; U3.63 70.048,108.59 70.223,108.764 C23.1 70.342,110.112 70.342,111.328 70.739,111.725 v1(70.739,111.887) 70.901,111.887 71.392,111.396 72.349,111.396 72.599,111.146 R14.2 ; v1(74.041,94.615) 74.203,94.615 74.584,94.234 75.789,94.234 75.949,94.074 76.548,94.673 U3.31 ; U3.47 79.923,105.305 80.007,105.221 81.237,105.221 82.699,103.759 v1(82.804,103.759)
  Top Layer w0.5: P4.2@36.979,126.562 GND.1@36.979,129.566 ; Q2.1@42.921,99.646 v1@44.414,101.139 ; v1(50.292,96.186) D3.2@50.292,97.853
  other v2: 66.548,52.371 69.85,52.371 73.025,52.371 76.454,52.371 79.502,52.371 82.804,52.371 85.471,52.371 88.265,52.371 91.059,52.371 93.853,52.371 97.028,52.371 100.457,52.371 28.194,52.498 30.861,52.498 33.655,52.498 36.449,52.498 62.865,52.498
"Interrupt Capable GPIO": R7.2 U3.24 | length 53.2
  Top Layer w0.2: R7.2 60.828,63.975 63.644,61.159 68.927,61.159 81.489,73.721 81.489,85.676 73.048,94.117 U3.24
LOCK_CONTROL: LOCK.1 R11.1 R17.2 U3.4 | length 43.3
  Top Layer w0.2: LOCK.1 43.688,94.613 43.111,95.19 R17.2 41.332,96.975 41.032,96.675 41.032,96.625 40.894,96.487 40.894,93.853 42.545,92.202 49.276,92.202 54.737,97.663 54.737,99.441 56.068,100.772 56.068,103.19 v1(56.007,103.251) ; v1(60.833,103.251) 60.886,103.198 63.897,103.198 65.004,104.305 U3.4
  Bottom Layer w0.2: v1@56.007,103.248 56.01,103.251 v1(60.833,103.251)
MISO: MISO.1 U1.23 U3.22 | length 42.3
  Top Layer w0.2: U1.23 61.709,71.194 62.798,70.105 69.824,70.105 71.231,71.512 v1(71.231,73.5) ; U3.22 72.048,94.065 76.819,89.294 76.819,80.962 73.136,77.279 v1(73.136,73.5)
  Bottom Layer w0.2: v1(71.231,73.5) v1(73.136,73.5)
MOSI: MOSI.1 U1.24 U3.23 | length 45.1
  Top Layer w0.2: U1.24 61.668,71.694 62.932,70.43 69.689,70.43 70.203,70.943 70.203,75.266 v1(70.85,75.913) ; U3.23 72.548,94.025 79.946,86.627 79.946,85.105 MOSI.1 79.994,81.911 v1(73.996,75.913)
  Bottom Layer w0.2: v1(70.85,75.913) v1(73.996,75.913)
NetC1_2: C1.2 C2.2 U1.1 | length 7.5
  Top Layer w0.2: C2.2 C1.2 54.808,75.481 54.808,72.08 55.194,71.694 U1.1
NetC3_2: C3.2 U1.30 Y1.2 | length 17
  Top Layer w0.2: U1.30 57.019,75.911 58.25,77.142 59.922,77.142 61.324,78.544 C3.2 C3.2 62.166,79.383 62.187,79.383 62.328,79.524 62.328,83.649 63.228,84.549 Y1.2
NetC6_1: C6.1 U1.31 Y1.1 | length 13.9
  Top Layer w0.2: Y1.1 54.924,81.366 56.907,79.383 56.928,79.383 C6.1@57.768,78.544 ; U1.31 56.519,77.294 57.091,77.866 57.091,77.867 C6.1@57.768,78.544 ; C6.1 C6.1@57.768,78.544
NetC7_1: C7.1 C9.1 R2.1 R5.2 R6.2 U1.16 U1.32 | length 41.4
  Top Layer w0.2: R2.1 53.836,81.247 56.019,79.064 56.019,74.159 55.483,73.623 v1(55.483,73.373) 55.688,73.168 55.688,72.85 56.019,72.519 U1.32 ; U1.16 60.641,67.544 61.035,67.15 v1(61.325,67.15) 62.048,66.427 64.785,66.427 ; C9.1 C7.1 64.785,64.234 64.785,66.427 ; R5.2 66.444,66.466 R6.2 64.785,66.427
  Bottom Layer w0.2: v1(55.483,73.373) 53.766,73.373 52.938,72.545 52.938,71.986 55.534,69.39 59.085,69.39 v1(61.325,67.15)
NetC12_2: C12.2 C13.2 U1.3 U1.4 | length 10.8
  Top Layer w0.2: C12.2 49.296,73.536 C13.2 51.15,73.5 53.956,70.694 U1.3 U1.4
NetC14_2: C14.2 C15.2 U1.11 | length 10.7
  Top Layer w0.2: U1.11 57.019,65.13 55.61,63.721 C15.2 56.881,61.943 59.166,59.658 C14.2
NetC16_1: C16.1 C17.1 L1.1 | length 10.8
  Top Layer w0.2: L1.1 43.532,75.055 44.294,74.293 44.294,73.605 47.446,70.453 C17.1 47.355,70.361 47.355,67.404 47.446,67.313 C16.1
NetC16_2: C16.2 C17.2 U1.5 | length 9.6
  Top Layer w0.2: C16.2 C17.2 52.192,70.452 52.95,69.694 U1.5
NetC18_1: C18.1 C22.2 R8.2 R19.2 | length 9.6
  Top Layer w0.2: C22.2 C18.1 54.167,53.144 54.467,52.844 R8.2 54.467,52.788 55.058,52.197 56.212,52.197 R19.2
NetC18_2: C18.2 C22.1 C24.1 C24.2 C34.1 C34.2 R9.1 R9.2 | length 680
  Top Layer w0.2: C34.1 38.68,56.968 38.68,57.603 39.243,58.166 41.391,58.166 42.788,56.769 R9.1 ; C34.2 40.713,56.134 41.529,56.134 42.037,55.626 44.323,55.626 44.538,55.841 R9.2 44.838,56.469 45.752,56.469 47.227,54.994 C18.2 ; C24.2 C24.2@41.899,53.984
  Top Layer w0.5: C34.1@38.446,56.085 C24.2@41.223,53.308 ; C34.2@40.296,56.085 C24.1@43.073,53.308
  Top Layer w1.37: C34.1 38.446,56.55 C34.1@38.446,56.085 ; C24.2@41,53.307 41,6.985 94.01,6.985 94.01,43.989 43.164,43.989 43.164,8.937 92.059,8.937 92.059,41.957 45.069,41.957 45.069,10.969 90.027,10.969 90.027,39.925 47.08,39.925 47.08,13.001 87.868,13.001 87.868,38.02 v1(48.879,38.02) ; C24.2 C24.2@41.223,53.308 ; C24.1@43.073,53.308 C24.1 43.164,53.216 v1(43.164,45.894)
  Bottom Layer w1.37: v1@43.189,45.869 48.076,45.869 48.879,45.066 v1(48.879,38.02)
NetC19_1: C19.1 C21.1 C25.2 L1.2 L2.1 | length 28.3
  Top Layer w0.2: C25.2 L2.1 C19.1 38.582,66.007 38.465,66.124 38.465,71.976 39.644,73.155 C21.1 43.291,74.371 42.457,75.204 42.457,75.744 L1.2
NetC19_2: C19.2 C20.1 U1.8 | length 16.6
  Top Layer w0.2: C20.1 40.606,67.858 C19.2 44.996,67.858 45.786,67.068 45.786,67.064 46.576,66.274 50.166,66.274 52.086,68.194 U1.8
NetC25_1: C25.1 C26.1 C28.1 L2.2 R8.1 | length 21.7
  Top Layer w0.2: C25.1 43.826,60.346 43.925,60.445 L2.2 L2.2 44.078,60.292 48.625,60.292 C26.1 48.879,60.037 49.554,59.361 49.692,59.361 54.166,54.888 54.167,54.888 54.466,54.589 54.466,54.539 R8.1 58.856,54.538 C28.1
NetC26_2: C26.2 C27.1 U1.9 | length 10.6
  Top Layer w0.2: C26.2 48.933,61.943 C27.1 C27.1 52.986,62.62 52.986,62.621 55.102,64.737 55.102,66.627 U1.9
NetD1_1: D1.1 LS1.N Q1.2 | length 12.5
  Top Layer w0.2: LS1.N 91.05,122 87.95,118.9 87.95,118 88,117.95 88.237,117.95 88.537,117.649 91.351,117.649 Q1.2
NetD2_1: D2.1 P3.2 Q2.2 | length 10.8
  Top Layer w0.2: D2.1@39.023,106.936 39.273,107.186 D2.1@39.273,106.816 ; Q2.2 Q2.2@41.745,101.998 ; P3.2@42.564,107.635 P3.2
  Top Layer w0.5: D2.1@38.735,106.936 41.865,106.936 ; Q2.2@41.745,101.998 41.745,106.816 P3.2@42.564,107.635
NetD3_1: D3.1 L3.1 U4.2 | length 14.5
  Top Layer w0.2: U4.2@43.002,114.447 U4.2 ; L3.1@47.176,110.273 47.176,109.992 L3.1 ; D3.1@49.507,104.308 D3.1
  Top Layer w0.5: U4.2@43.002,114.447 L3.1@47.176,110.273 ; L3.1 47.328,106.487 D3.1@49.507,104.308
NetDS1_1: DS1.1 U3.33 | length 1.4
  Top Layer w0.2: U3.33 79.098,98.255 79.59,98.255 79.798,98.047 80.048,98.047 DS1.1
NetDS1_2: DS1.2 R18.1 | length 1.8
  Top Layer w0.2: DS1.2 81.329,96.397 81.357,96.368 81.599,96.368 81.899,96.068 R18.1
NetQ1_3: Q1.3 R10.2 | length 8.2
  Top Layer w0.2: R10.2 85.363,110.64 87.248,112.525 88.625,112.525 89.873,113.772 Q1.3
NetQ2_3: Q2.3 R11.2 | length 2.6
  Top Layer w0.5: R11.2 39.682,99.007 39.921,99.246 Q2.3
NetR3_2: R3.2 U1.12 | length 5.7
  Top Layer w0.2: U1.12 57.519,65.319 58.316,64.522 R3.2
NetR4_2: R4.2 U1.14 | length 2.4
  Top Layer w0.2: U1.14 58.519,66.77 59.663,65.626 R4.2
NetR5_1: R5.1 U1.19 | length 8.6
  Top Layer w0.2: U1.19 66.506,69.194 67.534,68.166 R5.1
NetR6_1: R6.1 U1.18 | length 6.5
  Top Layer w0.2: U1.18 63.022,68.694 63.589,68.127 R6.1
NetR7_1: R7.1 U1.13 | length 4
  Top Layer w0.2: U1.13 58.019,66.152 59.078,65.093 R7.1
NetR12_2: BUCK.1 R12.2 U4.5 | length 12.1
  Top Layer w0.2: U4.5 48.971,115.414 BUCK.1 56.953,110.41 57.741,109.623 R12.2
NetR13_1: R13.1 U1.27 | length 5.8
  Top Layer w0.2: U1.27 58.544,72.369 58.544,72.594 59.513,73.563 61.756,73.563 62.493,74.301 R13.1
NRST: P2.5 U3.7 | length 19.8
  Top Layer w0.2: U3.7 67.598,102.855 68.166,102.855 68.373,103.062 68.373,106.461 67.37,107.464 67.37,111.397 72.06,116.086 73.953,116.086 P2.5
PWM_BUZZER: PWM.1 R10.1 R16.2 U3.41 | length 15.4
  Top Layer w0.2: U3.41 85.207,102.305 85.324,102.422 85.324,108.151 R10.1 85.363,108.24 85.663,108.54 88.237,108.54 PWM.1
"Reader Pwr Enable (GPIO)": PWR.1 R1.2 R15.2 U1.28 U3.3 | length 44.3
  Top Layer w0.2: U1.28 58.044,72.369 58.044,72.875 59.42,74.251 R1.2 R15.2 61.325,74.351 62.732,75.758 62.732,78.209 PWR.1 63.754,91.137 v1(63.754,96.52) ; v1(63.836,104.277) 63.933,104.277 64.482,104.827 67.526,104.827 U3.3
  Bottom Layer w0.2: v1(63.754,96.52) 63.795,96.561 63.795,104.236 v1(63.836,104.277)
RX: P5.4 U3.52 | length 25.1
  Top Layer w0.2: v1(71.882,99.822) 71.882,103.571 73.612,105.3 75.498,107.187 75.498,107.755 U3.52
  Bottom Layer w0.2: P5.4 59.783,95.631 67.691,95.631 v1(71.882,99.822)
"Slave Select (GPIO)": U1.21 U3.20 | length 40
  Top Layer w0.2: U1.21 62.249,70.194 62.663,69.78 69.959,69.78 72.461,72.282 72.461,80.44 74.758,82.737 74.758,90.896 71.606,94.048 71.606,94.989 71.098,95.496 71.098,96.255 U3.20
SYS_JTCK_SWCLK: P2.2 U3.49 | length 9.5
  Top Layer w0.2: U3.49 77.098,107.855 77.098,108.305 79.742,110.949 79.742,112.047 P2.2
SYS_JTDO-SWO: P2.6 U3.55 | length 7.8
  Top Layer w0.2: P2.6 74.048,113.451 U3.55
SYS_JTMS_SWDIO: P2.4 U3.46 | length 11.7
  Top Layer w0.2: v1(77.552,104.785) 77.562,104.795 79.038,104.795 U3.46 ; v1(77.597,110.029) P2.4
  Bottom Layer w0.2: v1(77.552,104.785) 77.575,104.808 77.575,110.007 v1(77.597,110.029)
TX: P5.5 U3.14 | length 11.1
  Top Layer w0.2: P5.5 63.563,99.305 U3.14
UNUSED_IO_1: P6.1 U3.42 | length 18.2
  Top Layer w0.2: U3.42 83.972,102.805 84.013,102.846 84.305,102.846 v1(84.439,102.98) ; v1(86.598,102.837) 86.713,102.952 87.729,102.952 P6.1
  Bottom Layer w0.2: v1(84.439,102.98) 84.51,102.908 86.527,102.908 v1(86.598,102.837)
UNUSED_IO_2: P6.2 U3.40 | length 17.5
  Top Layer w0.2: U3.40 89.122,101.805 P6.2
UNUSED_IO_3: P6.3 U3.39 | length 16.6
  Top Layer w0.2: U3.39 91.162,101.305 P6.3
UNUSED_IO_4: P6.4 U3.38 | length 15.8
  Top Layer w0.2: U3.38 93.202,100.805 P6.4
UNUSED_IO_5: P6.5 U3.37 | length 15.7
  Top Layer w0.2: U3.37 93.448,100.305 P6.5
UNUSED_IO_6: P6.6 U3.36 | length 16.5
  Top Layer w0.2: U3.36 91.408,99.805 P6.6
UNUSED_IO_7: P6.7 U3.35 | length 17.4
  Top Layer w0.2: U3.35 89.368,99.305 P6.7
UNUSED_IO_8: P6.8 U3.34 | length 18.2
  Top Layer w0.2: U3.34 87.328,98.805 P6.8
VBAT: P1.1 U3.1 VBAT.1 | length 7.5
  Top Layer w0.2: P1.1 61.36,108.151 VBAT.1 64.789,108.114 67.098,105.805 U3.1
XIN: R13.2 U3.5 | length 34.6
  Top Layer w0.2: R13.2@63.357,76.051 63.657,76.351 63.657,77.947 67.765,82.055 68.693,82.055 71.202,84.565 71.202,88.386 66.122,93.465 v1(66.122,97.673) ; v1(66.059,100.912) 66.059,102.884 66.93,103.755 67.498,103.755 U3.5
  Bottom Layer w0.2: v1(66.059,100.912) 66.091,100.88 66.091,97.705 v1(66.122,97.673)
pads on no net: P5.1 P5.6 U1.20 U1.22 U1.33 U1.34 U1.35 U1.36 U1.37 U1.38 U3.6 U3.8 U3.9 U3.10 U3.11 U3.16 U3.17 U3.21 U3.25 U3.26 U3.27 U3.28 U3.29 U3.30 U3.43 U3.44 U3.45 U3.50 U3.51 U3.53 U3.54 U3.56 U3.57 U3.58 U3.59 U3.61 U3.62 U4.6
copper on no net:
  other v3: 90,66 34,86 78,128

## Polygon pours and split planes (outlines as drawn)
GND on Bottom Layer "GND_L02_P000" (solid, pour order 0): 26,50.974 103,50.974 103,135 26,135

## Silkscreen, mask and mechanical layers (free items; w line width, h text height)
Top Overlay:
  text "3V3" at 85.779,116.833 h1.2 r90
  text "JTDO" at 73.079,116.706 h1.2 r90
  text "NRST" at 75.619,116.706 h1.2 r90
  text "GND" at 80.699,116.706 h1.2 r90
  text "JTMS" at 78.159,116.579 h1.2 r90
  text "JTCK" at 83.112,116.579 h1.2 r90
  text "GND" at 62.668,110.022 h1.2
  text "+" at 44.45,109.902 h1.52
  text "IO 1" at 96.196,109.387 h1.2
  text "-" at 44.577,107.108 h1.52
  text "IO 2" at 96.196,106.593 h1.2
  text "IO 3" at 96.196,104.053 h1.2
  text "IO 4" at 96.196,101.513 h1.2
  text "3V3" at 60.226,100.667 h1.2
  text "IO 5" at 96.196,98.973 h1.2
  text "GND" at 60.353,98.127 h1.2
  text "IO 6" at 96.196,96.179 h1.2
  text "TX" at 60.353,95.714 h1.2
  text "IO 7" at 96.196,93.766 h1.2
  text "RX" at 60.353,93.301 h1.2
  text "IO 8" at 96.196,91.226 h1.2
  text "GND" at 96.196,88.813 h1.2
  text "3V3" at 96.069,86.019 h1.2
  text "Adina Valjakka" at 50.254,21.762 h1.52
  text "Anton Ahlinder" at 50.254,19.254 h1.52
  text "2021-11-30 Rev. A" at 50.254,16.254 h1.52

## Text inside footprints (layer, text, board x,y; h text height)
LS1: Top Overlay "+" at 86.368,124.403 h1.27 r180